# Altium PCB Final decision V4.PcbDoc (part 1 of 2)
Units mm, origin at the board's own origin, x right, y up, seen from the top; angles counter-clockwise.
Board outline 75 x 61 mm, 4 copper layers (Top Layer, Signal, GND, Bottom Layer), stack 0.603 mm thick; 144 components, 114 nets, 552 pads, 168 vias.
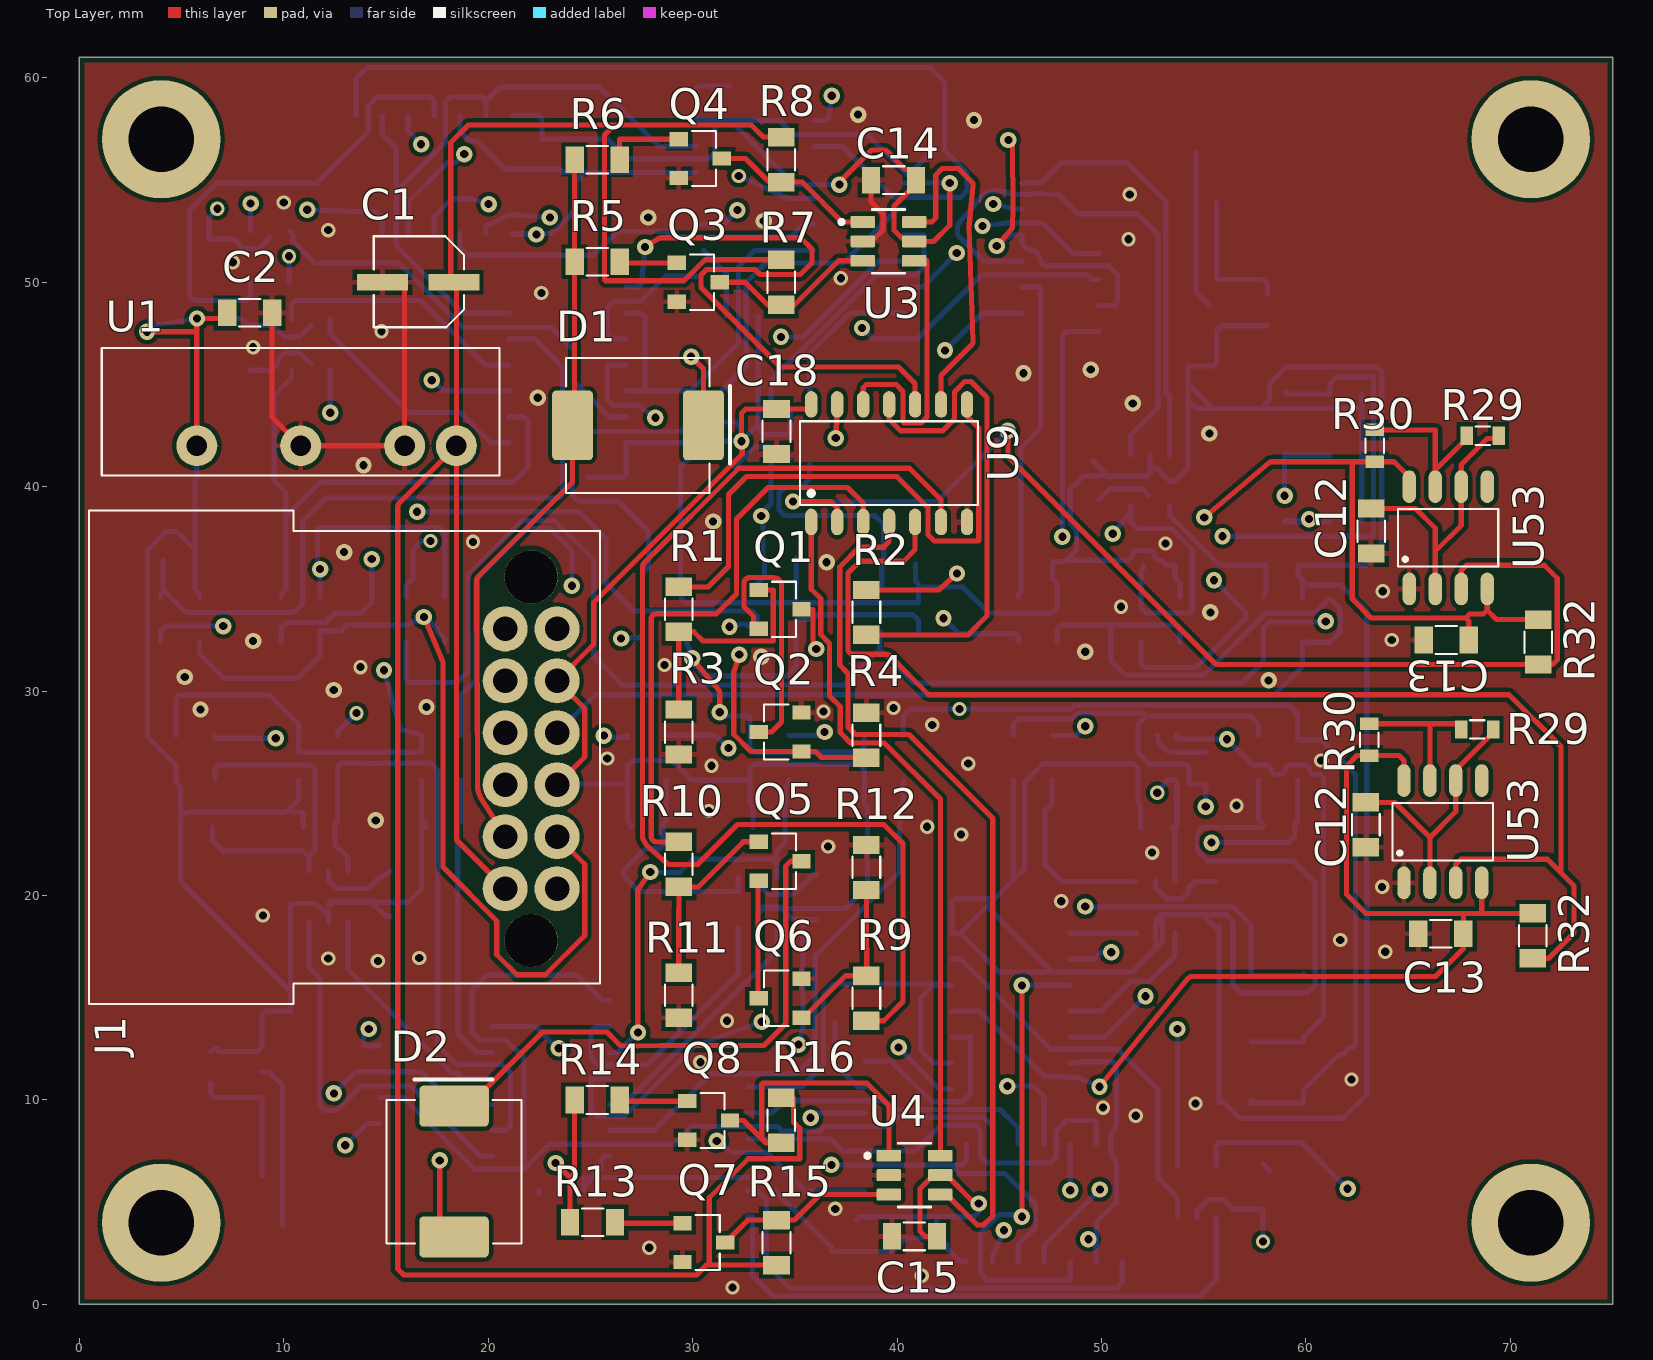
[diagram p0: Top Layer view]
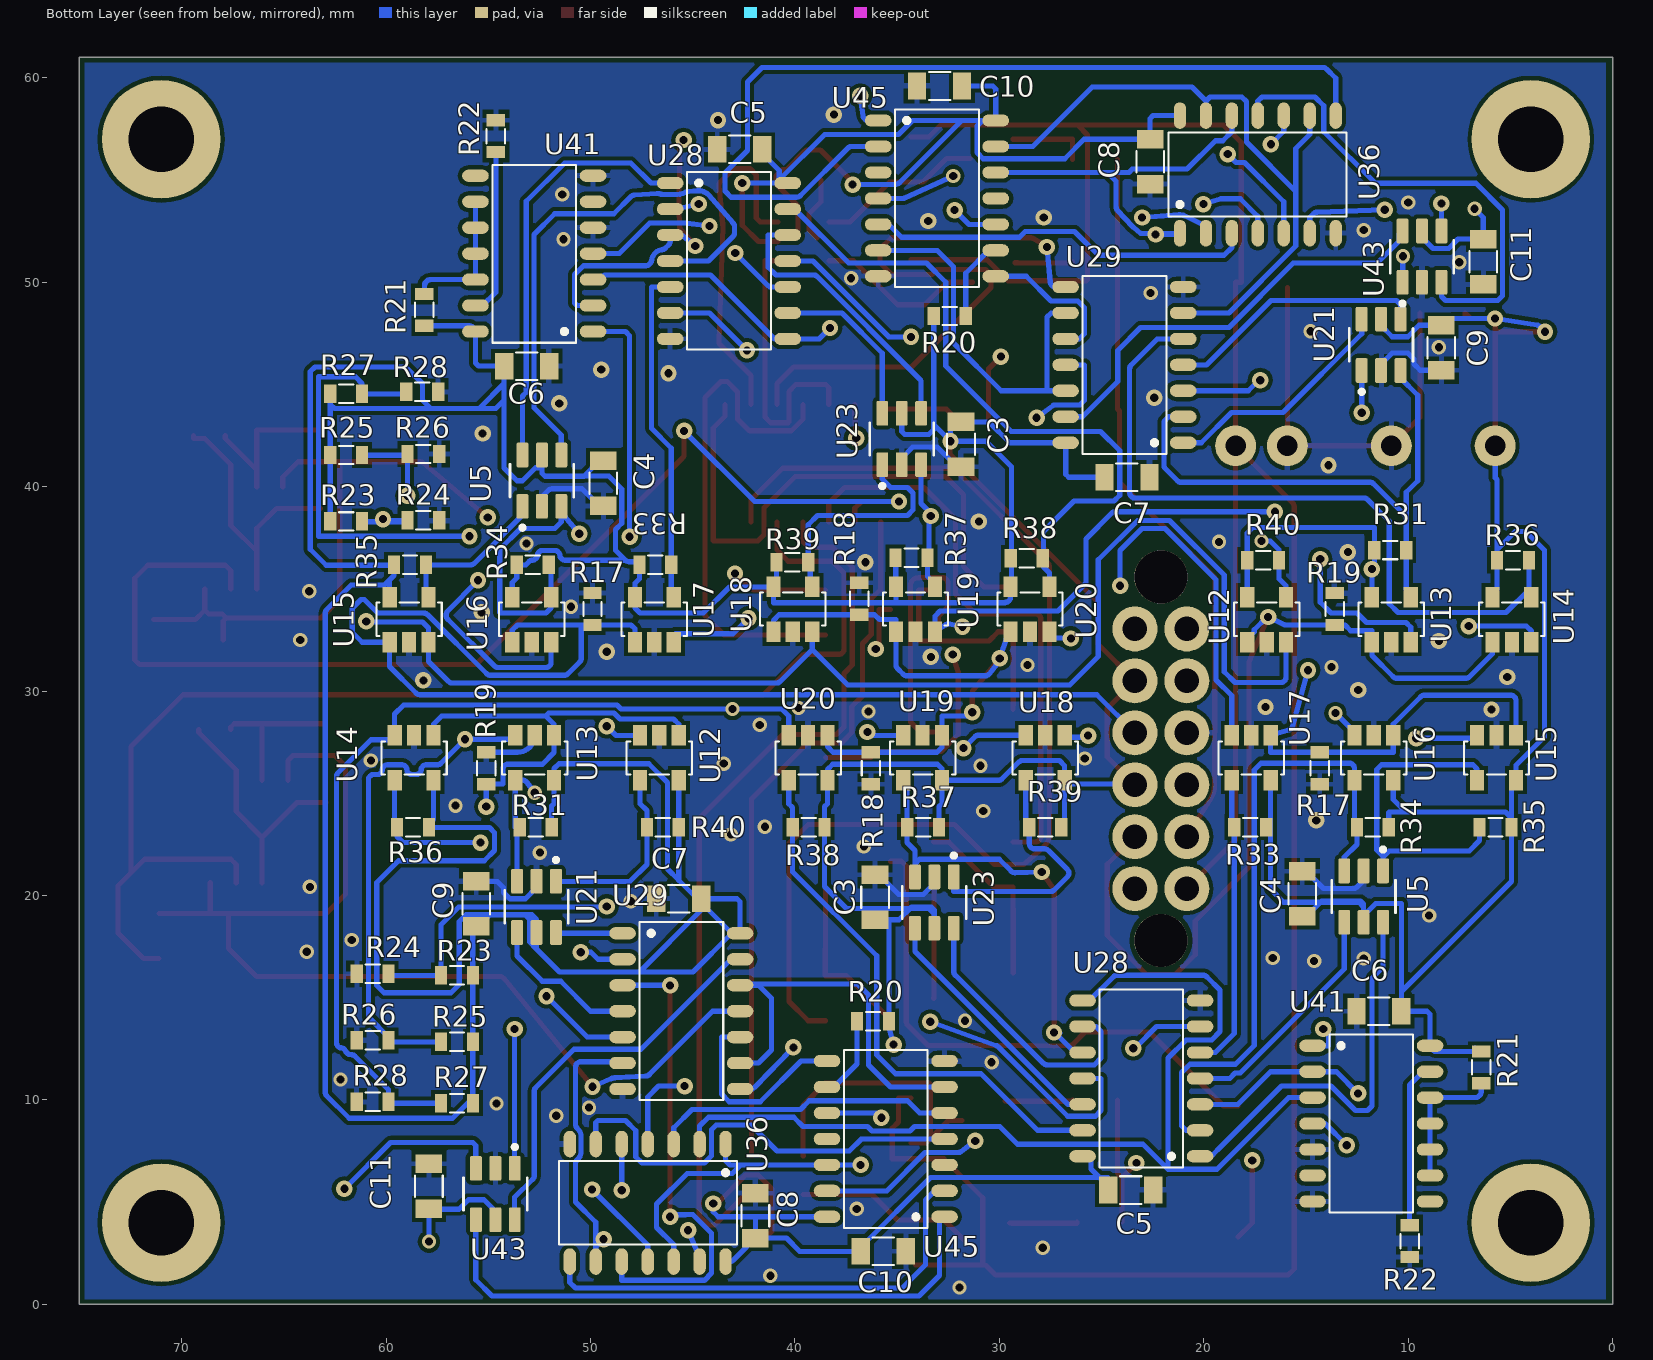
[diagram p1: Bottom Layer view, seen from below]
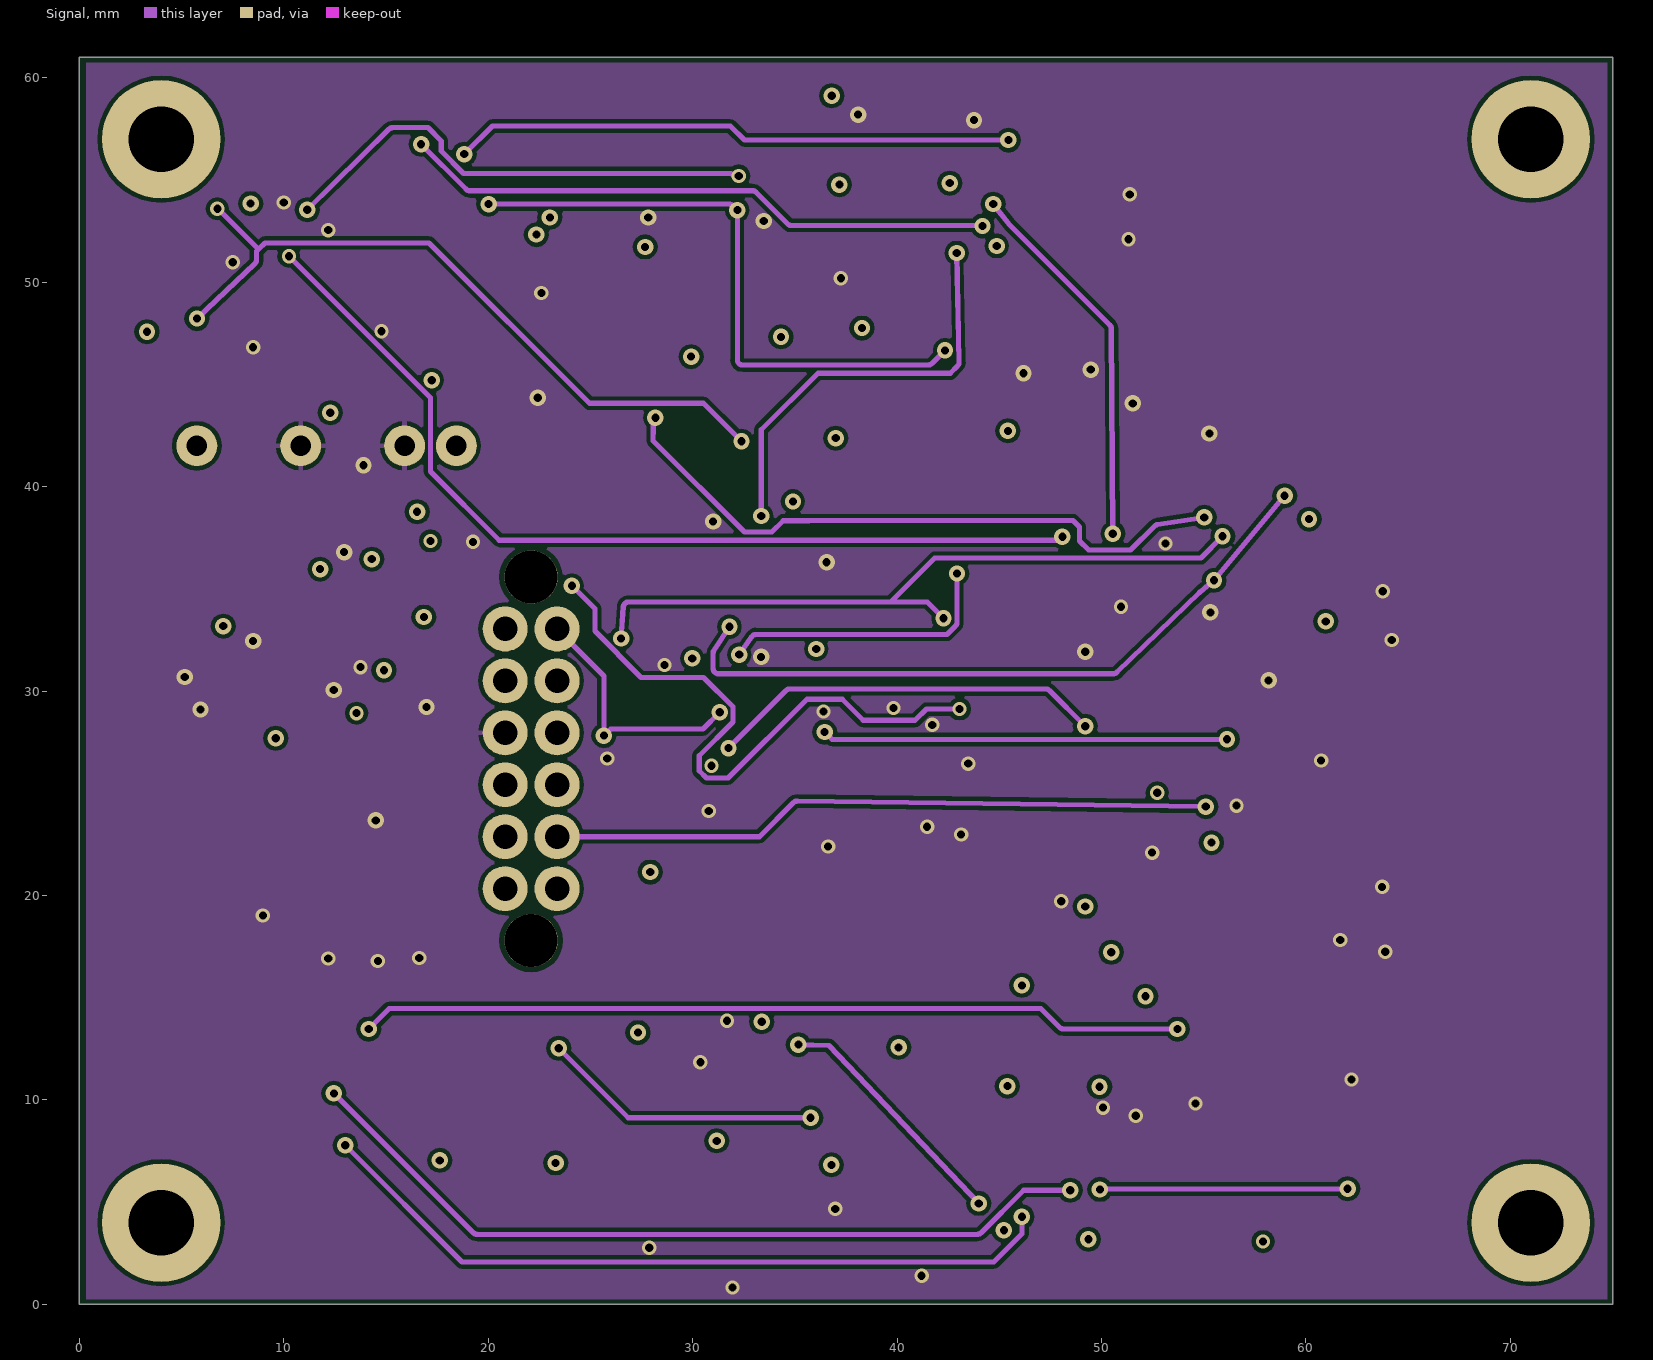
[diagram p2: Signal]
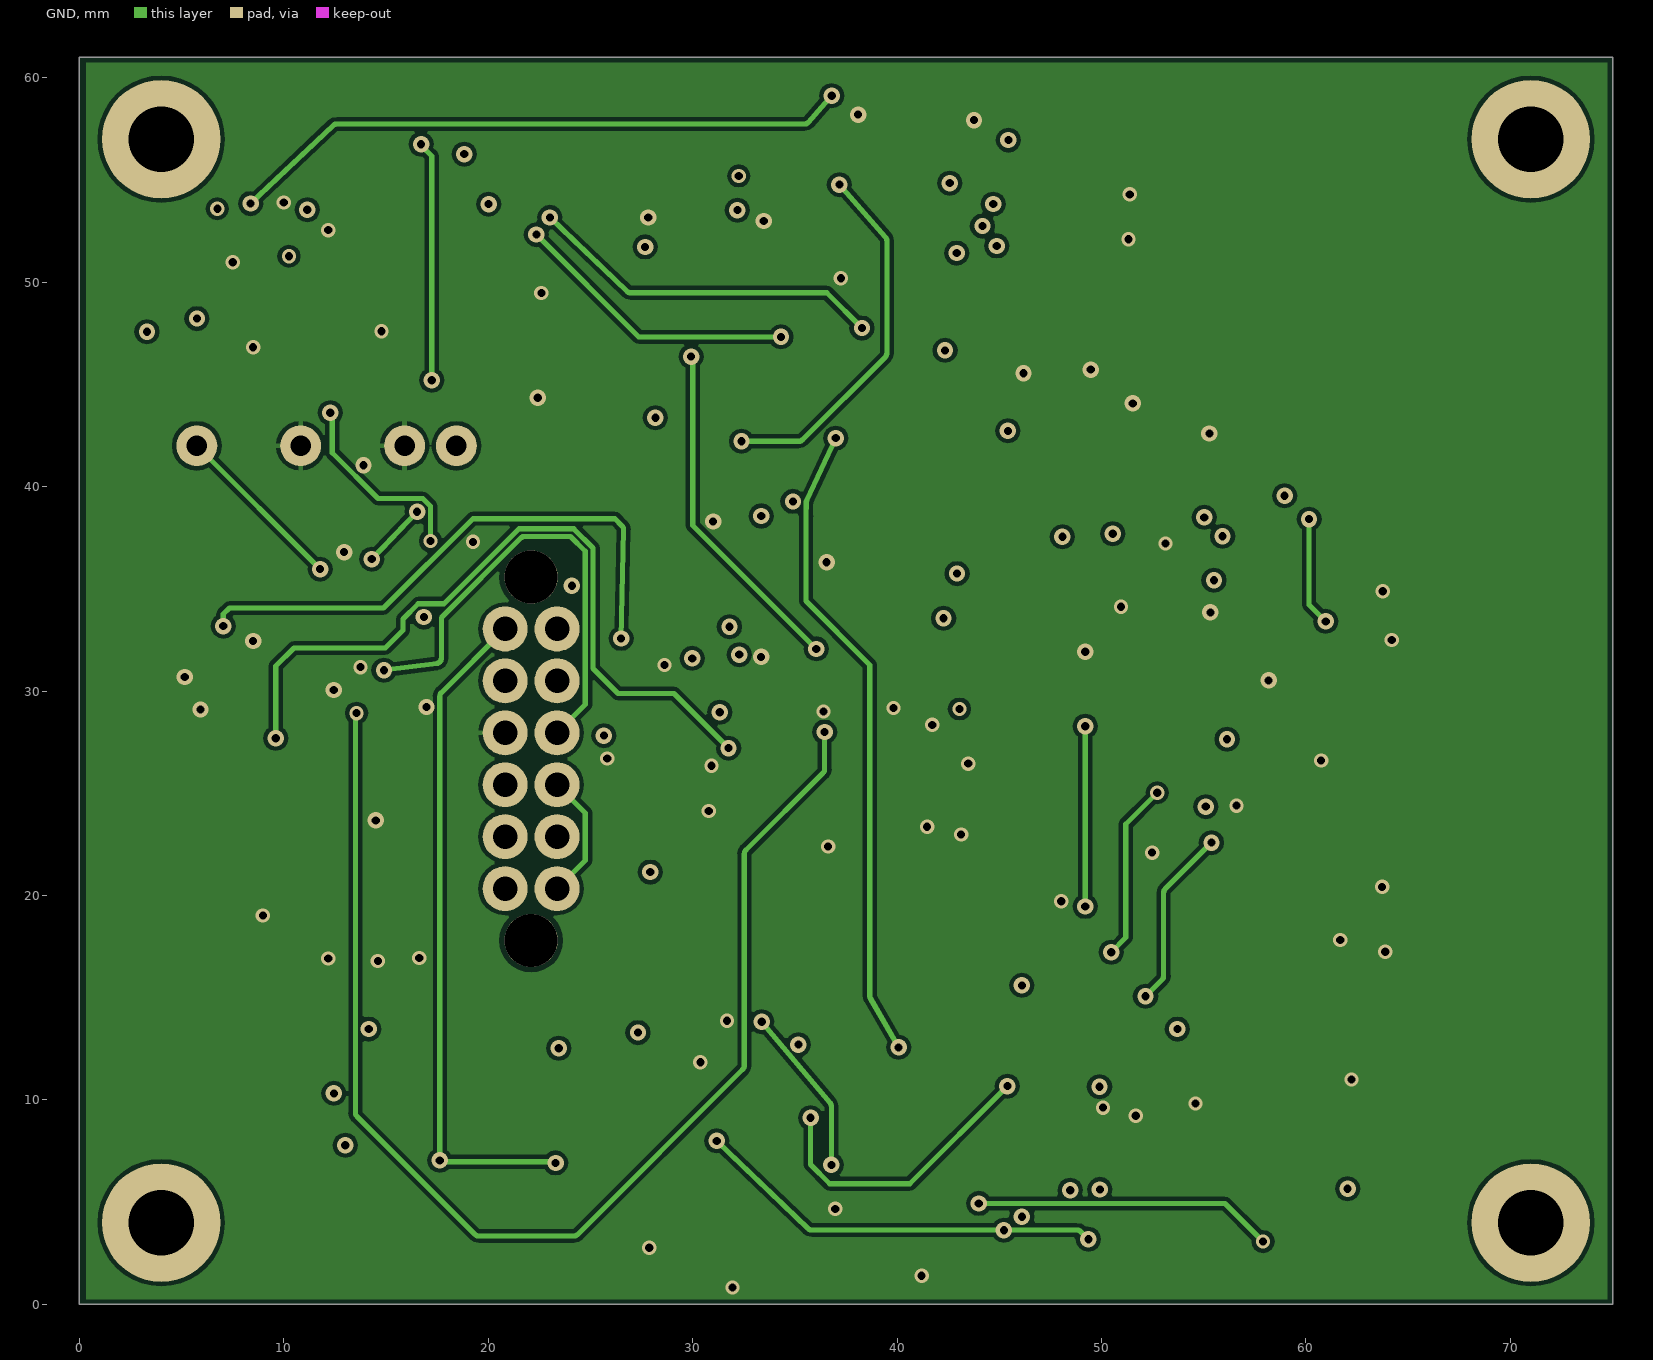
[diagram p3: GND]

## Layer stack, top to bottom
Top Solder: solder mask 0.0102, Solder Resist, Dk 3.5
Top Layer: signal copper 0.0356
Dielectric 2: prepreg 0.0711, PP-006, Dk 4.1
Signal: signal copper 0.035
Dielectric 1: dielectric 0.32, FR-4, Dk 4.8
GND: signal copper 0.035
Dielectric 3: prepreg 0.0711, PP-006, Dk 4.1
Bottom Layer: signal copper 0.0356
Bottom Solder: solder mask 0.0102, Solder Resist, Dk 3.5

## Board outline
0,0 0,61 75,61 75,0

## Design rules (kind name [scope] priority, off if disabled: settings)
AcuteAngle [All] p1: minimum=3.50000000000000E+0001 checktracksonly=FALSE
BoardOutlineClearance "BoardOutlineClearance 1" [All] p1: gap=0.25 ignorepadtopadclearanceinfootprint=FALSE except(0: Arc-SplitContinuation Track-SplitContinuation SMDPad-SplitContinuation THPad-SplitContinuation Via-SplitContinuation Fill-SplitContinuation Poly-SplitContinuation Region-SplitContinuation Text-SplitContinuation) // Milling
Clearance "Clearance-1 1/2 Oz" [All] p1: gap=0.125 ignorepadtopadclearanceinfootprint=FALSE except(0.2: Arc-Fill Arc-Poly Track-Fill Track-Poly SMDPad-SMDPad SMDPad-Fill SMDPad-Poly THPad-Fill THPad-Poly Via-Fill Via-Poly Fill-Fill Fill-Poly Poly-Poly Poly-Region Poly-Text; 0.25: Arc-Hole Track-Hole SMDPad-Hole THPad-Hole Via-Hole Fill-Hole Poly-Hole Region-Hole Text-Hole) // Standart
ComponentClearance [All] p1: gap=0.1 collisioncheckmode=3 verticalgap=0.1 showdistances=FALSE
DiffPairsRouting "DiffPairsRouting 1/2 Oz" [All] p1: maxlimit=0.254 minlimit=0.125 mostfreqgap=0.254 toplayer_minwidth=0.125 toplayer_maxwidth=0.381 toplayer_prefwidth=0.381 midlayer1_minwidth=0.125 midlayer1_maxwidth=0.381 midlayer1_prefwidth=0.381 midlayer2_minwidth=0.125 midlayer2_maxwidth=0.381 midlayer2_prefwidth=0.381 bottomlayer_minwidth=0.125 bottomlayer_maxwidth=0.381 bottomlayer_prefwidth=0.381 maxuncoupledlength=12.7
HoleSize "Minimum HoleSize" [IsPad] p1: absolutevalues=TRUE maxlimit=5.9 minlimit=0.6 maxpercent=80.000 minpercent=20.000
HoleSize "Minimum HoleSize VIA 1" [IsVia] p2: absolutevalues=TRUE maxlimit=5.9 minlimit=0.3 maxpercent=80.000 minpercent=20.000 // Standart
HoleToHoleClearance Hole2HoleClearance [All] p1: gap=0.25 allowstackedmicrovias=FALSE
MinimumAnnularRing "Minimum AR VIA Standart" [All] p1: minimumring=0.15
MinimumAnnularRing "Minimum AR PAD Standart" [All] p2: minimumring=0.2
MinimumSolderMaskSliver "SolderMask Bridge Standart" [All] p1: minsoldermaskwidth=0.15 // All Masks
PlaneClearance "PlaneClearance-1 1/2 Oz" [All] p1: clearance=0.2 // Standart
PlaneConnect "TermalConnect-1 1/2 Oz" [All] p1: planeconnectstyle=Relief reliefexpansion=0.2 reliefentries=4 reliefconductorwidth=0.2 reliefairgap=0.2 // Standart
PolygonConnect "PolygonConnect-1 1/2 Oz" [All] p1: thpad.connectstyle=Relief thpad.reliefconductorwidth=0.254 thpad.reliefentries=4 thpad.polygonreliefangle="90 Angle" thpad.airgapwidth=0.2 smdpad.connectstyle=Relief smdpad.reliefconductorwidth=0.254 smdpad.reliefentries=4 smdpad.polygonreliefangle="90 Angle" smdpad.airgapwidth=0.2 via.connectstyle=Direct via.reliefconductorwidth=0.254 via.reliefentries=4 via.polygonreliefangle="90 Angle" via.airgapwidth=0.254 // Standart
RoomDefinition A1 [InComponentClass('A1')] p1: confinementstyle=ConfineIn formatcopy=TRUE lockcomponents=FALSE outline 44.775,0.451 74.8,0.451 74.8,60.15 44.775,60.15
RoomDefinition A2 [InComponentClass('A2')] p2: confinementstyle=ConfineIn formatcopy=TRUE lockcomponents=FALSE outline 39.765,0.297 69.215,0.297 69.215,61.573 39.765,61.573
RoomDefinition PL [InComponentClass('PL')] p3: confinementstyle=ConfineIn formatcopy=TRUE lockcomponents=FALSE outline 25.225,1.115 43.725,1.115 43.725,16.615 25.225,16.615
RoomDefinition SL [InComponentClass('SL')] p4: confinementstyle=ConfineIn formatcopy=TRUE lockcomponents=FALSE outline 24.375,41.875 42.875,41.875 42.875,57.375 24.375,57.375
RoomDefinition "Sheet1 V2" [InComponentClass('Sheet1 V2')] p5: confinementstyle=ConfineIn formatcopy=TRUE lockcomponents=FALSE outline 50.325,0 50.325,62 -10.675,62 -10.675,0
RoutingCorners [All] p1 off: cornerstyle=45-Degree minsetback=2.54 maxsetback=2.54
RoutingVias [All] p1: holewidth=0.4 width=0.8 viastyle="Through Hole" minholewidth=0.3 minwidth=0.6 maxholewidth=5.9 maxwidth=8.9
SilkToSilkClearance Silk2SilkClearance [All] p1 off: silktosilkclearance=0.15
SilkToSolderMaskClearance Silk2SolderMaskClearance [IsPad] p1 off: minsilkscreentomaskgap=0.15 clearancetoexposedcopper=TRUE
SolderMaskExpansion SolderMaskExpansion-1 [All] p1: expansion=0.05 istentingtop=FALSE // Standart
UnRoutedNet [All] p1: checkbadconnections=TRUE
Width "Width 1/2 Oz" [All] p1: maxlimit=10 minlimit=0.125 preferedwidth=0.254 checkconnectedcopper=TRUE
19 further rules are at their usual default settings.

## Classes and differential pairs
channel class SignalReciever: A1 A2
channel class Logic: PL SL
component class "Sheet1 V2": C1 C2 C14 C15 C18 D1 D2 J1 Q1 Q2 Q3 Q4 Q5 Q6 Q7 Q8 R1 R2 R3 R4 R5 R6 R7 R8 R9 R10 R11 R12 R13 R14 R15 R16 U1 U3 U4 U9
component class SL: C12 C13 R29 R30 R32 U53
component class A2: C3 C4 C5 C6 C7 C8 C9 C10 C11 R17 R18 R19 R20 R21 R22 R23 R24 R25 R26 R27 R28 R31 R33 R34 R35 R36 R37 R38 R39 R40 U5 U12 U13 U14 U15 U16 U17 U18 U19 U20 U21 U23 U28 U29 U36 U41 U43 U45
component class A1: C3 C4 C5 C6 C7 C8 C9 C10 C11 R17 R18 R19 R20 R21 R22 R23 R24 R25 R26 R27 R28 R31 R33 R34 R35 R36 R37 R38 R39 R40 U5 U12 U13 U14 U15 U16 U17 U18 U19 U20 U21 U23 U28 U29 U36 U41 U43 U45
component class PL: C12 C13 R29 R30 R32 U53

## Components (designator, comment, footprint, x,y, rotation, side; value= is the part's Value field where it differs from the comment)
C1 "4.7uF" "Bar Cap 4x5.4" 14.825,50 r90 top
C2 "4.7uF" "0805 Capicator" 8.325,48.5 r180 top
C3 "0.1uF" "0805 Capicator" 36.08,19.918 r270 bottom locked
C3 "0.1uF" "0805 Capicator" 31.875,42.072 r90 bottom
C4 "0.1uF" "0805 Capicator" 15.18,20.085 r270 bottom locked
C4 "0.1uF" "0805 Capicator" 49.375,40.16 r90 bottom
C5 "0.1uF" "0805 Capicator" 23.58,5.595 r0 bottom locked
C5 "0.1uF" "0805 Capicator" 42.7,56.5 r180 bottom
C6 "0.1uF" "0805 Capicator" 11.43,14.345 r180 bottom locked
C6 "0.1uF" "0805 Capicator" 53.125,45.9 r0 bottom
C7 "0.1uF" "0805 Capicator" 45.68,19.845 r180 bottom locked
C7 "0.1uF" "0805 Capicator" 23.755,40.46 r0 bottom
C8 "0.1uF" "0805 Capicator" 41.93,4.345 r270 bottom locked
C8 "0.1uF" "0805 Capicator" 22.625,55.9 r90 bottom
C9 "0.1uF" "0805 Capicator" 55.588,19.592 r270 bottom locked
C9 "0.1uF" "0805 Capicator" 8.375,46.795 r90 bottom
C10 "0.1uF" "0805 Capicator" 35.68,2.595 r0 bottom locked
C10 "0.1uF" "0805 Capicator" 32.925,59.6 r180 bottom
C11 "0.1uF" "0805 Capicator" 57.9,5.775 r90 bottom
C11 "0.1uF" "0805 Capicator" 6.325,51.01 r270 bottom
C12 "4.7uF" "0805 Capicator" 62.933,23.456 r270 top
C12 "4.7uF" "0805 Capicator" 63.198,37.831 r270 top
C13 "10nF" "0805 Capicator" 66.6,18.125 r0 top
C13 "10nF" "0805 Capicator" 66.865,32.5 r0 top
C14 "0.1uF" "0805 Capicator" 39.825,55 r180 top
C15 "0.1uF" "0805 Capicator" 40.85,3.325 r180 top
C18 "0.1uF" "0805 Capicator" 34.1,42.7 r90 top
D1 "Diode" DO-214AB(SMC) 27.325,43 r0 top
D2 "Diode" DO-214AB(SMC) 18.325,6.5 r90 top
J1 "Stack64 6x2" Conn6x2(Molex) 22.095,35.58 r270 top
Q1 "MOSFET-N [IRLML]" SOT-23 33.225,34.95 r270 top
Q2 "MOSFET-N [IRLML]" SOT-23 35.325,27.05 r90 top
Q3 "NPN" SOT-23 29.225,50.95 r270 top
Q4 "NPN" SOT-23 29.325,57 r270 top
Q5 "MOSFET-N [IRLML]" SOT-23 33.225,22.627 r270 top
Q6 "MOSFET-N [IRLML]" SOT-23 35.325,14.025 r90 top
Q7 "NPN" SOT-23 29.5,3.975 r270 top
Q8 "NPN" SOT-23 29.725,9.95 r270 top
R1 "10k" "0805 Resistor" 29.325,34 r90 top
R2 "10k" "0805 Resistor" 38.5,33.848 r270 top
R3 "10k" "0805 Resistor" 29.325,28 r90 top
R4 "10k" "0805 Resistor" 38.5,27.848 r270 top
R5 "10k" "0805 Resistor" 25.325,51 r180 top
R6 "10k" "0805 Resistor" 25.325,56 r180 top
R7 "1k" "0805 Resistor" 34.325,50 r90 top
R8 "1k" "0805 Resistor" 34.325,56 r90 top
R9 "10k" "0805 Resistor" 38.5,14.975 r270 top
R10 "10k" "0805 Resistor" 29.325,21.525 r90 top
R11 "10k" "0805 Resistor" 29.325,15.127 r90 top
R12 "10k" "0805 Resistor" 38.5,21.373 r270 top
R13 "10k" "0805 Resistor" 25.1,4.025 r180 top
R14 "10k" "0805 Resistor" 25.325,10 r180 top
R15 "1k" "0805 Resistor" 34.1,3.025 r270 top
R16 "1k" "0805 Resistor" 34.325,9 r90 top
R17 "1k" "0603 Resistor" 14.33,26.23 r90 bottom locked
R17 "1k" "0603 Resistor" 49.9,34.015 r270 bottom
R18 "1k" "0603 Resistor" 36.28,26.23 r90 bottom locked
R18 "1k" "0603 Resistor" 36.85,34.515 r270 bottom
R19 "1k" "0603 Resistor" 55.105,26.23 r270 bottom locked
R19 "1k" "0603 Resistor" 13.6,34.015 r270 bottom
R20 "1k" "0603 Resistor" 36.18,13.845 r180 bottom locked
R20 "1k" "0603 Resistor" 32.425,48.35 r0 bottom
R21 "10k" "0603 Resistor" 6.43,11.595 r270 bottom locked
R21 "10k" "0603 Resistor" 58.125,48.65 r90 bottom
R22 "10k" "0603 Resistor" 9.93,3.095 r270 bottom locked
R22 "10k" "0603 Resistor" 54.625,57.15 r90 bottom
R23 "1k" "0603 Resistor" 56.53,16.095 r0 bottom locked
R23 "1k" "0603 Resistor" 61.95,38.3 r180 bottom
R24 "3.9k" "0603 Resistor" 60.655,16.17 r180 bottom locked
R24 "3.9k" "0603 Resistor" 58.175,38.35 r0 bottom
R25 "2k" "0603 Resistor" 56.53,12.845 r180 bottom locked
R25 "2k" "0603 Resistor" 61.95,41.55 r0 bottom
R26 "3k" "0603 Resistor" 60.655,12.92 r180 bottom locked
R26 "3k" "0603 Resistor" 58.175,41.6 r0 bottom
R27 "3k" "0603 Resistor" 56.53,9.845 r180 bottom locked
R27 "3k" "0603 Resistor" 61.95,44.55 r0 bottom
R28 "2k" "0603 Resistor" 60.655,9.92 r180 bottom locked
R28 "2k" "0603 Resistor" 58.225,44.65 r0 bottom
R29 "51k" "0603 Resistor" 68.38,28.125 r0 top
R29 "51k" "0603 Resistor" 68.645,42.5 r0 top
R30 "4.7k" "0603 Resistor" 63.1,27.625 r90 top
R30 "4.7k" "0603 Resistor" 63.365,42 r90 top
R31 "3k" "0603 Resistor" 52.68,23.345 r180 bottom locked
R31 "3k" "0603 Resistor" 10.875,36.9 r0 bottom
R32 "24k" "0805 Resistor" 71.1,18.025 r270 top
R32 "24k" "0805 Resistor" 71.365,32.4 r270 top
R33 "3k" "0603 Resistor" 17.729,23.345 r180 bottom locked
R33 "3k" "0603 Resistor" 46.825,36.175 r0 bottom
R34 "3k" "0603 Resistor" 11.729,23.345 r180 bottom locked
R34 "3k" "0603 Resistor" 52.825,36.175 r0 bottom
R35 "3k" "0603 Resistor" 5.729,23.345 r180 bottom locked
R35 "3k" "0603 Resistor" 58.825,36.175 r0 bottom
R36 "3k" "0603 Resistor" 58.68,23.345 r180 bottom locked
R36 "3k" "0603 Resistor" 4.875,36.4 r0 bottom
R37 "3k" "0603 Resistor" 33.73,23.345 r180 bottom locked
R37 "3k" "0603 Resistor" 34.295,36.525 r0 bottom
R38 "3k" "0603 Resistor" 39.33,23.345 r180 bottom locked
R38 "3k" "0603 Resistor" 28.655,36.5 r0 bottom
R39 "3k" "0603 Resistor" 27.755,23.345 r180 bottom locked
R39 "3k" "0603 Resistor" 40.125,36.3 r0 bottom
R40 "3k" "0603 Resistor" 46.46,23.345 r180 bottom locked
R40 "3k" "0603 Resistor" 17.095,36.4 r0 bottom
U1 "DC/DC" SIP7 18.445,42 r270 top
U3 "Inv" SOT236 39.58,52 r0 top
U4 "Inv" SOT236 40.85,6.325 r0 top
U5 "Inv" SOT236 12.18,19.951 r270 bottom locked
U5 "Inv" SOT236 52.375,40.294 r90 bottom
U9 "2And" SOIC-14 35.8,38.275 r0 top
U12 "Comp" SOT-23-5 46.63,27.845 r0 bottom locked
U12 "Comp" SOT-23-5 16.925,32.4 r180 bottom
U13 "Comp" SOT-23-5 52.73,27.845 r0 bottom locked
U13 "Comp" SOT-23-5 10.825,32.4 r180 bottom
U14 "Comp" SOT-23-5 58.63,27.845 r0 bottom locked
U14 "Comp" SOT-23-5 4.925,32.4 r180 bottom
U15 "Comp" SOT-23-5 5.679,27.845 r0 bottom locked
U15 "Comp" SOT-23-5 58.875,32.4 r180 bottom
U16 "Comp" SOT-23-5 11.679,27.845 r0 bottom locked
U16 "Comp" SOT-23-5 52.875,32.4 r180 bottom
U17 "Comp" SOT-23-5 17.679,27.845 r0 bottom locked
U17 "Comp" SOT-23-5 46.875,32.4 r180 bottom
U18 "Comp" SOT-23-5 27.754,27.845 r0 bottom locked
U18 "Comp" SOT-23-5 40.1,32.9 r180 bottom
U19 "Comp" SOT-23-5 33.754,27.845 r0 bottom locked
U19 "Comp" SOT-23-5 34.1,32.9 r180 bottom
U20 "Comp" SOT-23-5 39.354,27.845 r0 bottom locked
U20 "Comp" SOT-23-5 28.5,32.9 r180 bottom
U21 "Inv" SOT236 52.638,19.447 r270 bottom locked
U21 "Inv" SOT236 11.325,46.94 r90 bottom
U23 "Inv" SOT236 33.18,19.655 r270 bottom locked
U23 "Inv" SOT236 34.775,42.334 r90 bottom
U28 "2And" SOIC-14 20.18,7.245 r90 bottom locked
U28 "2And" SOIC-14 46.1,54.85 r270 bottom
U29 "2And" SOIC-14 48.43,18.155 r270 bottom locked
U29 "2And" SOIC-14 21.005,42.15 r90 bottom
U36 "2XOR" SOIC-14 43.39,7.845 r0 bottom locked
U36 "2XOR" SOIC-14 21.165,52.4 r180 bottom
U41 "4NOR" SOIC-14 14.68,12.655 r270 bottom locked
U41 "4NOR" SOIC-14 49.875,47.59 r90 bottom
U43 "Inv" SOT236 54.65,5.4 r270 bottom
U43 "Inv" SOT236 9.325,51.255 r90 bottom
U45 "4AND" SOIC-14 32.68,4.285 r90 bottom locked
U45 "4AND" SOIC-14 35.925,57.91 r270 bottom
U53 "NE555P" SOIC-8 64.79,20.625 r90 top
U53 "NE555P" SOIC-8 65.055,35 r90 top

## Footprints (in the part's own frame and the unit in brackets; to place one, negate y for a bottom-side part, rotate by r counter-clockwise, add the part's x,y. Pads: shape width x height; smd on the part's side, far side on the other; paste and mask are expansions set on the pad)
"0603 Resistor" [mm]
  rect 0.6x0.9 smd: 1(-0.78,0) 2(0.78,0)
  silkscreen extent -0.35,-0.45 0.35,0.45, body extent -0.85,-0.45 0.85,0.45, height 0.55
"0805 Capicator" [mm]
  rect 0.9x1.3 smd: 1(-1.1,0) 2(1.1,0)
  silkscreen extent -0.53,-0.68 0.52,0.67, body extent -1.05,-0.67 1.05,0.68, height 0.75
"0805 Resistor" [mm]
  rect 0.9x1.3 smd: 1(-1.1,0) 2(1.1,0)
  silkscreen extent -0.52,-0.68 0.53,0.67, body extent -1.05,-0.67 1.05,0.68, height 0.6
"Bar Cap 4x5.4" [mm]
  rect 0.8x2.5 smd: 1(0,0) 2(0,-3.5)
  silkscreen extent -2.2,-4 2.25,0.42, body extent -2.15,-4.3 2.15,0.7, height 5.4
Conn6x2(Molex) [mm]
  round 2.2 hole 1.2: 1(2.54,1.27) 2(5.08,1.27) 3(7.62,1.27) 4(10.16,1.27) 5(12.7,1.27) 6(15.24,1.27) 7(2.54,-1.27) 8(5.08,-1.27) 9(7.62,-1.27) 10(10.16,-1.27) 11(12.7,-1.27) 12(15.24,-1.27)
  round 2.6 hole 2.6 unplated: A(0,0) A(17.78,0)
  silkscreen extent -3.25,-21.63 20.88,3.37, body extent -3.15,-31.93 20.79,3.23, height 22.06
DO-214AB(SMC) [mm]
  rrect20% 2x3.4 smd: 1(-3.2,0) 2(3.2,0)
  silkscreen extent -3.53,-3.3 4.5,3.3, body extent -4.06,-3.15 4.06,3.15, height 2.77
SIP7 [mm]
  round 2 hole 1: 1(0,0) 2(0,-2.54) 4(0,-7.62) 6(0,-12.7)
  silkscreen extent -4.78,-17.35 1.45,2.1, body extent -4.7,-17.27 1.39,2.03, height 10.16
SOIC-8 [mm]
  oval 1.6x0.65 smd: 1(0,0) 2(0,-1.27) 3(0,-2.54) 4(0,-3.81) 5(5,-3.81) 6(5,-2.54) 7(5,-1.27) 8(5,0)
  silkscreen extent 1.1,-4.35 3.9,0.55, body extent -0.36,-4.35 5.41,0.55, height 1.45
SOIC-14 [mm]
  oval 0.6x1.3 smd paste+0 mask+0.1: 1(0,0) 2(1.27,0) 3(2.54,0) 4(3.81,0) 5(5.08,0) 6(6.35,0) 7(7.62,0) 8(7.62,5.75) 9(6.35,5.75) 10(5.08,5.75) 11(3.81,5.75) 12(2.54,5.75) 13(1.27,5.75) 14(0,5.75)
  silkscreen extent -0.55,0.83 8.15,4.92, body extent -0.52,-0.12 8.13,5.87, height 1.75
SOT236 [mm]
  rrect25% 1.21x0.58 smd: 1(-1.255,0.95) 2(-1.255,0) 3(-1.255,-0.95) 4(1.255,-0.95) 5(1.255,0) 6(1.255,0.95)
  silkscreen extent -2.4,-1.56 0.8,1.56, body extent -1.4,-1.45 1.4,1.45, height 1.45
SOT-23 [mm]
  rect 0.7x0.9 smd: 1(0,0) 2(1.9,0) 3(0.95,2.1)
  silkscreen extent -0.4,0.65 2.3,1.83, body extent -0.55,-0.17 2.45,2.23, height 1.1
SOT-23-5 [mm]
  rect 0.7x1 smd mask+0.045: 1(-0.95,0) 2(0,0) 3(0.95,0) 4(0.95,2.2) 5(-0.95,2.2)
  silkscreen extent -1.6,0.3 1.6,1.92, body extent -1.5,-0.15 1.5,2.35, height 1.1

## Part data
C1: library part "Cap Pol 4.7uF", "ECAP SMD,  35V, 105°C", Manufacturer=Epcos, Part Number=B41121A7475M000, ComponentLink1Description=Chip&Dip, ComponentLink1URL=https://www.chipdip.ru/product/b41121a7475m000, Type=Capacitor
C2 C12 C12: library part "Cap 4.7uF (0805)", "4.7uF X5R 10% 25V 0805", Manufacturer="Murata Manufacturing", Part Number=GRM21BR61E475KA12L, ComponentLink1Description=Chip&Dip, ComponentLink1URL=https://www.chipdip.ru/product/grm21br61e475ka12l, Type=Capacitor
C3 C3 C4 C4 C5 C5 C6 C6 C7 C7 C8 C8 C9 C9 C10 C10 C11 C11 C14 C15 C18: library part "Cap 0.1uF (0805)", "0.1uF X7R 25V 10% 0805", Manufacturer="Murata Manufacturing", Part Number=GRM21BR71E104KA01L, ComponentLink1Description=Chip&Dip, ComponentLink1URL=https://www.chipdip.ru/product/grm21br71e104ka01l, Type=Capacitor
C13 C13: library part "Cap 10nF (0805)", "0805 X7R 10nF 100V 10%", Manufacturer="Murata Manufacturing", Part Number=GRM21BR72A103KA01L, ComponentLink1Description=Chip&Dip, ComponentLink1URL=https://www.chipdip.ru/product/grm21br72a103ka01l, Type=Capacitor
D1 D2: library part "Diode (SMC)", "3A 50V, (DO-214AB/SMC)", Manufacturer="Yangzhou Yangjie Electronic Technology", Part Number=GS3A, ComponentLink1Description=DataSheet, ComponentLink1URL=https://static.chipdip.ru/lib/152/DOC001152906.pdf, ComponentLink2Description=Chip&Dip, ComponentLink2URL=https://www.chipdip.ru/product/gs3a, Type=Diode
J1: library part "Conn 12 [Stack64]", "Stac64 Right-Angle Header Assembly, 12 Circuits, Polarization A, Black, Tray / Current - Maximum per Contact 10.0A / Voltage - Maximum 500V", ComponentLink1Description=Molex, ComponentLink1URL=https://www.molex.com/molex/products/part-detail/pcb_headers/0346910120, ComponentLink2Description=DataSheet, ComponentLink2URL=https://www.molex.com/webdocs/datasheets/pdf/en-us/0346910120_PCB_HEADERS.pdf
Q1 Q2 Q5 Q6: "VDS 30V,  VGS Max ± 20V, RDS 27-40mΩ,", Manufacturer="Infineon Technologies", Part Number=IRLML0030TRPBF, ComponentLink1Description=DataSheet, ComponentLink1URL=https://static.chipdip.ru/lib/300/DOC000300382.pdf, ComponentLink2Description=Chip&Dip, ComponentLink2URL=https://www.chipdip.ru/product/irlml0030trpbf, Type=Transistor
Q3 Q4 Q7 Q8: library part "NPN [BC817]", "NPN general-purpose transistors", Manufacturer=Nexperia, Part Number=BC817-40,215, ComponentLink1Description=DataSheet, ComponentLink1URL=https://static.chipdip.ru/lib/156/DOC000156781.pdf, ComponentLink2Description=Chip&Dip, ComponentLink2URL=https://www.chipdip.ru/product/bc817-40, Type=Transistor
R1 R2 R3 R4 R5 R6 R9 R10 R11 R12 R13 R14: library part "Res 10k (0805)", "0.125W 0805 10k, 1%", Manufacturer=Taiwan, Part Number=RC0805FR-0710KL, ComponentLink1Description=Chip&Dip, ComponentLink1URL=https://www.chipdip.ru/product0/9000079514, Type=Resistor
R7 R8 R15 R16: library part "Res 1k (0805)", "0.125W 0805 1k, 1%", Manufacturer=Taiwan, Part Number=RC0805FR-071KL, ComponentLink1Description=Chip&Dip, ComponentLink1URL=https://www.chipdip.ru/product0/9000079486, Type=Resistor
R17 R17 R18 R18 R19 R19 R20 R20 R23 R23: library part "Res 1k (0603)", "0.1W 0603 1k, 1%", Manufacturer=Taiwan, Part Number=RC0603FR-071KL, ComponentLink1Description=Chip&Dip, ComponentLink1URL=https://www.chipdip.ru/product0/9000079676, Type=Resistor
R21 R21 R22 R22: library part "Res 10k (0603)", "0.1W 0603 10k, 1%", Manufacturer=Taiwan, Part Number=RC0603FR-0710KL, ComponentLink1Description=Chip&Dip, ComponentLink1URL=https://www.chipdip.ru/product0/9000079736, Type=Resistor
R24 R24: library part "Res 3.9k (0603)", "0.1W 0603 3.9k, 1%", Manufacturer=Taiwan, Part Number=RC0603FR-073K9L, ComponentLink1Description=Chip&Dip, ComponentLink1URL=https://www.chipdip.ru/product0/9000079726, Type=Resistor
R25 R25 R28 R28: library part "Res 2k (0603)", "0.1W 0603 2k, 1%", Manufacturer=Taiwan, Part Number=RC0603FR-072KL, ComponentLink1Description=Chip&Dip, ComponentLink1URL=https://www.chipdip.ru/product0/9000079719, Type=Resistor
R26 R26 R27 R27 R31 R31 R33 R33 R34 R34 R35 R35 R36 R36 R37 R37 R38 R38 R39 R39 R40 R40: library part "Res 3k (0603)", "0.1W 0603 3k, 1%", Manufacturer=Taiwan, Part Number=RC0603FR-073KL, ComponentLink1Description=Chip&Dip, ComponentLink1URL=https://www.chipdip.ru/product0/9000079723, Type=Resistor
R29 R29: library part "Res 51k (0603)", "0.1W 0603 51k, 1%", Manufacturer=Taiwan, Part Number=RC0603FR-0751KL, ComponentLink1Description=Chip&Dip, ComponentLink1URL=https://www.chipdip.ru/product0/9000079753, Type=Resistor
R30 R30: library part "Res 4.7k (0603)", "0.1W 0603 4.7k, 1%", Manufacturer=Taiwan, Part Number=RC0603FR-074K7L, ComponentLink1Description=Chip&Dip, ComponentLink1URL=https://www.chipdip.ru/product0/9000079728, Type=Resistor
R32 R32: library part "Res 24k (0805)", "0.125W 0805 24k, 1%", Manufacturer=Taiwan, Part Number=RC0805FR-0724KL, ComponentLink1Description=Chip&Dip, ComponentLink1URL=https://www.chipdip.ru/product0/9000079523, Type=Resistor
U1: library part "DC/DC Isolated 24V-5V [TMH]", "The TMH series are ultra miniature, isolated 2 Watt DC/DC-converters in a Single-in-Line  package  (SIP)", Manufacturer="Traco Power", Part Number=TMH2405S, ComponentLink1Description=Chip&Dip, ComponentLink1URL=https://www.chipdip.ru/product/tmh-2405s, ComponentLink2Description=DataSheet, ComponentLink2URL=https://static.chipdip.ru/lib/005/DOC001005854.pdf, Type=IC
U3 U4 U5 U5 U21 U21 U23 U23 U43 U43: library part "Inverter (SN74)", "Dual inverter, 1.65-5.5V", Manufacturer="Texas Instruments", Part Number=SN74LVC2G04DBVR, ComponentLink1Description=Chip&Dip, ComponentLink1URL=https://www.chipdip.ru/product/sn74lvc2g04dbvr-2, ComponentLink2Description=DataSheet, ComponentLink2URL=https://static.chipdip.ru/lib/021/DOC001021810.pdf, Type=IC
U9 U28 U28 U29 U29: library part 4(2And), "4 logic elements \"2AND\"", Manufacturer="Texas Instruments", Part Number=SN74AC08DR, ComponentLink1Description=DataSheet, ComponentLink1URL=https://static.chipdip.ru/lib/551/DOC001551527.pdf, ComponentLink2Description=Chip&Dip, ComponentLink2URL=https://www.chipdip.ru/product/sn74ac08dr, Type=IC
U12 U12 U13 U13 U14 U14 U15 U15 U16 U16 U17 U17 U18 U18 U19 U19 U20 U20: library part "Comparator [LMV]", "Differential comparator with strobes", Manufacturer="Texas Instruments", Part Number=LMV331M5/NOPB, ComponentLink1Description=DataSheet, ComponentLink1URL=https://static.chipdip.ru/lib/291/DOC000291302.pdf, ComponentLink2Description=Chip&Dip, ComponentLink2URL=https://www.chipdip.ru/product/lmv331m5-nopb, Type=IC
U36 U36: library part 4(2XOR), "4 logic elements \"2XOR\"", Manufacturer=Nexperia, Part Number=74HC86D,653, ComponentLink1Description=Chip&Dip, ComponentLink1URL=https://www.chipdip.ru/product/74hc86d, ComponentLink2Description=DataSheet, ComponentLink2URL=https://ru.mouser.com/datasheet/2/916/74HC_HCT86-1319799.pdf, Type=IC
U41 U41: library part 2(4NOR), "2 logic elements \"4NOR\"", Manufacturer=Nexperia, Part Number=74HC4002D,652, ComponentLink1Description=Chip&Dip, ComponentLink1URL=https://www.chipdip.ru/product/74hc4002d, ComponentLink2Description=DataSheet, ComponentLink2URL=https://static.chipdip.ru/lib/493/DOC011493188.pdf, Type=IC
U45 U45: library part 2(4AND), "2 logic elements \"4AND\"", Manufacturer=Nexperia, Part Number=74HC21D,653, ComponentLink1Description=Chip&Dip, ComponentLink1URL=https://www.chipdip.ru/product/74hc21d.653, ComponentLink2Description=DataSheet, ComponentLink2URL=https://static.chipdip.ru/lib/522/DOC011522559.pdf, Type=IC
U53 U53: "Standard Timer Single 8-Pin PDIP Tube", Case/Package=PDIP, Current Rating=10mA, Frequency=500kHz, High Level Output Current=-200mA, Low Level Output Current=200mA, Manufacturer="Texas Instruments", Max Operating Temperature=70°C, Max Supply Voltage=16V, Min Operating Temperature=0°C, Min Supply Voltage=4.5V, Nominal Supply Current=2mA, Operating Supply Voltage=5V, Package Quantity=50, Quiescent Current=15mA, Category="Clock and Timing", ComponentLink1Description=https://datasheet.ciiva.com/1139/sa555-1139904.pdf?src-supplier=Element14, ComponentLink1URL=https://datasheet.ciiva.com/1139/sa555-1139904.pdf?src-supplier=Element14, ComponentLink2Description=https://datasheet.ciiva.com/19457/904085-19457361.pdf?src-supplier=Jameco, ComponentLink2URL=https://datasheet.ciiva.com/19457/904085-19457361.pdf?src-supplier=Jameco, ComponentLink3Description=https://datasheet.ciiva.com/26325/152184-da-01-en-ne555p-timer-tid-26325915.pdf?src-supplier=Conrad, ComponentLink3URL=https://datasheet.ciiva.com/26325/152184-da-01-en-ne555p-timer-tid-26325915.pdf?src-supplier=Conrad, ComponentLink4Description=https://datasheet.ciiva.com/1147/1764032-1147750.pdf?src-supplier=Newark, ComponentLink4URL=https://datasheet.ciiva.com/1147/1764032-1147750.pdf?src-supplier=Newark, ComponentLink5Description=https://datasheet.ciiva.com/14094/ne555-series-eng-tds-14094950.pdf?src-supplier=Distrelec, ComponentLink5URL=https://datasheet.ciiva.com/14094/ne555-series-eng-tds-14094950.pdf?src-supplier=Distrelec, ComponentLink6Description=https://datasheet.ciiva.com/14274/ne555-14274456.pdf?src-supplier=Avnet, ComponentLink6URL=https://datasheet.ciiva.com/14274/ne555-14274456.pdf?src-supplier=Avnet, ComponentLink7Description=https://datasheet.ciiva.com/15152/getdatasheetpartid-248510-15152620.pdf?src-supplier=Verical, ComponentLink7URL=https://datasheet.ciiva.com/15152/getdatasheetpartid-248510-15152620.pdf?src-supplier=Verical, ComponentLink8Description=https://datasheet.ciiva.com/1233/ne555-1233454.pdf?src-supplier=Digi-Key, ComponentLink8URL=https://datasheet.ciiva.com/1233/ne555-1233454.pdf?src-supplier=Digi-Key, ComponentLink9Description=https://datasheet.ciiva.com/26228/ne555-26228892.pdf?src-supplier=Avnet+Europe, ComponentLink9URL=https://datasheet.ciiva.com/26228/ne555-26228892.pdf?src-supplier=Avnet+Europe, Contact Plating=Gold, Height=4.57mm, Lead Free="Lead Free", Length=9.81mm, Manufacturer Part Number=NE555P, Mount=SMD, Number of Pins=8, Number of Timers/Counters=1, Operating Supply Current=10mA, Packaging=Rail/Tube, Pricing 1="1=0,37000, 10=0,29900, 25=0,27360, 100=0,20350, 250=0,18444, 500=0,15264, 1000=0,11448, 2500=0,10494, 5000=0,10020 (USD)", Radiation Hardening=No, REACH SVHC="No SVHC", RoHS=Yes, RoHS Compliant=Yes, Supplier 1=Digi-Key, Weight=0.015535oz, Width=6.35mm

## Free pads (board coordinates)
  round 5.8 hole 3.2: A(4,57) A(4,4) A(71,57) A(71,4)

## Via types
v1: diameter 0.8, hole 0.4, Top Layer to Bottom Layer, 113 vias
v2: diameter 0.7, hole 0.4, Top Layer to Bottom Layer, 55 vias

## Nets (pads, with @x,y where several pads share a name; then routed paths per layer and width w, separated by ;. In a path a pad name is that pad's centre, name@x,y a point inside that pad or via, vN(x,y) a via of type N, cw(c..) or ccw(c..) an arc to the next point about the centre after c; other vN are vias at no path point)
2V_A1: R27.1@61.17,44.55 R28.2@59.005,44.65 U14.3@3.975,32.4 U17.3@45.925,32.4 U20.3@27.55,32.9 | length 92.4
  Signal w0.254: v1(26.5,32.575) 26.607,34.123 cw(c26.861,34.105) 26.861,34.359 29.376,34.359 39.685,34.359 ; v1(42.27,33.562) 41.474,34.359 39.685,34.359 ; v1(55.918,37.576) 54.862,36.519 41.846,36.519 39.685,34.359
  GND w0.254: v1(7.04,33.181) 7.04,33.766 7.339,34.065 14.883,34.065 19.254,38.435 26.196,38.435 26.547,38.084 cw(c26.367,37.905) 26.621,37.899 v1(26.5,32.575)
  Bottom Layer w0.254: U14.3@3.975,32.4 3.975,32.936 4.221,33.181 v1(7.04,33.181) ; v1(26.5,32.575) 27.307,32.612 ccw(c27.296,32.865) 27.55,32.865 U20.3@27.55,32.9 ; v1(42.27,33.562) 43.026,32.806 45.843,32.806 45.925,32.724 U17.3@45.925,32.4 ; v1(55.918,37.576) 63.301,37.576 63.301,45.373 61.498,45.373 61.17,45.046 R27.1@61.17,44.55 61.17,44.535 59.005,44.535 R28.2@59.005,44.65
2V_A2: R27.1@57.31,9.845 R28.2@59.875,9.92 U14.3@59.58,27.845 U17.3@18.629,27.845 U20.3@40.304,27.845 | length 91.2
  Signal w0.254: v1(24.092,35.15) 24.1,35.15 25.217,34.033 25.217,32.936 27.48,30.673 30.537,30.673 31.975,29.235 31.975,28.494 30.323,26.842 30.323,26.101 30.676,25.748 31.736,25.748 35.59,29.602 37.317,29.602 38.346,28.573 40.883,28.573 41.435,29.125 v2(43.05,29.125)
  Bottom Layer w0.254: U17.3@18.629,27.845 18.629,29.779 19.4,30.55 19.4,35.45 21.9,37.95 23.025,37.95 24.1,36.875 24.1,35.158 v1(24.092,35.15) ; U20.3@40.304,27.845 40.304,28.787 40.642,29.125 v2(43.05,29.125) 48.507,29.125 48.703,29.321 59.136,29.321 59.58,28.877 U14.3@59.58,27.845 59.58,27.619 60.736,27.619 62.351,26.004 ; R27.1@57.31,9.995 R27.1@57.31,9.845 57.31,9.839 59.875,9.839 R28.2@59.875,9.92 59.875,10.499 61.519,12.143 cw(c61.698,11.964) 61.698,12.218 61.735,12.218 ccw(c61.735,12.47) 61.971,12.383 cw(c62.209,12.294) 62.171,12.545 62.209,12.55 ccw(c62.171,12.802) 62.425,12.802 62.425,25.824 ccw(c62.171,25.824) 62.351,26.004
3V_A1: R25.1@61.17,41.55 R26.2@58.955,41.6 U13.3@9.875,32.4 U16.3@51.925,32.4 U19.3@33.15,32.9 | length 81.3
  Signal w0.254: v1(31.8,33.15) 31.042,31.999 ccw(c31.254,31.859) 31,31.859 31,31.103 ccw(c31.254,31.104) 31.253,30.85 50.57,30.85 ccw(c50.57,31.104) 50.746,30.921 54.805,34.835 cw(c54.982,34.653) 54.817,34.846 v1(55.5,35.425) v1(58.955,39.554)
  GND w0.254: v1(14.305,36.458) v1(16.523,38.775)
  Bottom Layer w0.254: U13.3@9.875,32.4 9.875,33.121 10.114,33.359 12.044,33.359 12.501,33.816 13.771,33.816 14.305,34.35 v1(14.305,36.458) ; v1(16.523,38.775) 24.328,38.775 cw(c24.328,38.521) 24.508,38.701 25.76,37.449 25.76,35.29 27.132,33.918 32.896,33.918 33.15,33.664 U19.3@33.15,32.9 32.708,33.188 32.618,33.247 ccw(c32.479,33.034) 32.426,33.282 v1(31.8,33.15) ; U16.3@51.925,32.4 51.925,31.408 ccw(c52.179,31.408) 52.179,31.154 54.513,31.154 ccw(c54.513,31.408) 54.692,31.228 56.981,33.517 ccw(c56.801,33.696) 57.052,33.663 57.057,33.696 ccw(c56.805,33.729) 56.986,33.907 v1(55.5,35.425) ; v1(58.955,39.554) R26.2@58.955,41.538 ; R26.2@58.955,41.6 R26.2@58.955,41.538 ; R25.1@61.17,41.55 61.17,41.538 R26.2@58.955,41.538
3V_A2: R25.1@57.31,12.845 R26.2@59.875,12.92 U13.3@53.68,27.845 U16.3@12.629,27.845 U19.3@34.704,27.845 | length 110.4
  Signal w0.254: v1(36.453,28) 36.826,27.627 56.121,27.627 v1(56.138,27.644)
  GND w0.254: v2(13.559,28.925) 13.5,28.866 13.5,9.377 ccw(c13.754,9.377) 13.574,9.198 19.348,3.424 ccw(c19.527,3.604) 19.526,3.35 24.195,3.35 ccw(c24.195,3.604) 24.375,3.424 32.454,11.503 ccw(c32.273,11.682) 32.527,11.682 32.527,22.039 cw(c32.781,22.038) 32.601,22.217 36.38,25.996 ccw(c36.199,26.175) 36.453,26.175 v1(36.453,28)
  Bottom Layer w0.254: U16.3@12.629,27.845 12.629,27.995 v2(13.559,28.925) v2@13.575,28.925 ; U19.3@34.704,27.845 34.704,27.822 36.276,27.822 v1(36.453,28) ; U13.3@53.68,27.845 53.68,27.644 v1(56.138,27.644) 57.311,26.471 ccw(c57.491,26.651) 57.491,26.397 58.03,26.397 cw(c58.03,26.145) 58.281,26.157 ccw(c58.535,26.171) 58.534,25.917 58.725,25.917 ccw(c58.724,26.171) 58.978,26.158 cw(c59.23,26.145) 59.23,26.397 59.93,26.397 cw(c59.93,26.145) 60.181,26.157 ccw(c60.435,26.171) 60.434,25.917 60.609,25.917 cw(c60.609,25.663) 60.863,25.663 60.863,14.053 59.875,13.065 R26.2@59.875,12.92 59.875,12.836 57.31,12.836 R25.1@57.31,12.845
4V_A1: R23.2@61.17,38.3 R24.2@58.955,38.35 U12.3@15.975,32.4 U15.3@57.925,32.4 U18.3@39.15,32.9 | length 72.3
  GND w0.254: v1(60.152,38.414) 60.152,34.223 v1(60.964,33.41)
  Bottom Layer w0.254: U12.3@15.975,32.4 15.975,30.679 ccw(c16.229,30.679) 16.229,30.425 18.475,30.425 19,30.95 19,35.675 21.675,38.35 23.233,38.35 25.159,36.424 25.159,31.7 26.559,30.3 37.412,30.3 39.15,32.038 ; U18.3@39.15,32.9 39.15,32.038 ; 40.714,30.474 39.15,32.038 ; 40.714,30.474 ccw(c40.894,30.654) 40.895,30.4 51.279,30.396 52.099,30.396 54.624,30.396 ; 54.625,30.396 54.895,30.396 ccw(c54.895,31.029) 54.896,30.396 56.767,30.4 ccw(c56.766,30.654) 56.945,30.474 57.925,31.454 U15.3@57.925,32.4 57.925,33.089 58.221,33.385 60.939,33.385 v1(60.964,33.41) ; v1(60.152,38.414) 60.088,38.35 R24.2@58.955,38.35 58.955,38.287 61.17,38.287 R23.2@61.17,38.3
4V_A2: R23.2@57.31,16.095 R24.2@59.875,16.17 U12.3@47.58,27.845 U15.3@6.629,27.845 U18.3@28.704,27.845 | length 86.7
  Signal w0.254: v1(31.754,27.212) 34.568,30.026 cw(c34.747,29.846) 34.747,30.1 47.278,30.1 cw(c47.278,29.846) 47.458,30.026 v1(49.204,28.279)
  GND w0.254: v1(9.606,27.695) 9.606,31.226 10.495,32.115 14.965,32.115 15.829,32.978 15.829,33.526 16.58,34.277 17.841,34.277 21.505,37.941 24.178,37.941 25.123,36.996 25.123,31.101 26.344,29.879 29.087,29.879 v1(31.754,27.212) ; v1(49.204,19.465) v1(49.204,28.279)
  Bottom Layer w0.254: U15.3@6.629,27.845 6.629,27.695 v1(9.606,27.695) ; U18.3@28.704,27.845 31.017,27.845 cw(c31.017,27.591) 31.196,27.77 v1(31.754,27.212) ; U12.3@47.58,27.845 47.58,27.822 48.747,27.822 v1(49.204,28.279) ; v1(49.204,19.465) 49.23,19.44 56.443,19.44 57.31,18.574 R23.2@57.31,16.095 57.31,16.087 59.875,16.087 R24.2@59.875,16.17
24V: C1.2 J1.12 R7.2 R8.2 R15.2 R16.2 U1.1 | length 143.9
  Top Layer w0.254: J1.12@20.825,20.34 18.445,22.72 U1.1@18.445,42 ; R15.2@34.1,1.925 30.815,1.925 ; R16.2@34.325,10.1 34.929,10.1 34.929,8.924 35.234,8.62 35.234,7.121 32.72,7.121 30.815,5.216 30.815,1.925 ; R7.2@34.325,51.1 30.598,51.1 29.57,50.072 25.735,50.072 25.684,50.123 25.684,57.21 26.166,57.692 ; R8.2@34.325,57.1 33.456,57.1 32.864,57.692 26.166,57.692 ; U1.1@18.445,42 15.649,39.204 ccw(c15.829,39.025) 15.575,39.025 15.575,1.729 15.873,1.431 30.18,1.431 30.673,1.925 30.815,1.925 ; U1.1@18.445,42 18.445,49.88 18.445,50 C1.2@18.325,50 18.165,50 18.165,56.829 19.029,57.692 26.166,57.692
GND: C1.1 C2.1 C3.1 C4.1 C5.1 C6.1 C7.1 C8.1 C9.1 C10.1 C11.2 C12.2 C13.1 C14.2 C15.2 C18.1 J1.9 Q2.2 Q3.2 Q4.2 Q6.2 Q7.2 Q8.2 R3.1 R4.1 R11.1 R12.1 R17.1 R18.1 R19.1 R22.2 R24.1 R26.1 R28.1 U1.2 U1.4 U3.2 U4.2 U5.2 U9.7 U12.2 U13.2 U14.2 U15.2 U16.2 U17.2 U18.2 U19.2 U20.2 U21.2 U23.2 U28.7 U29.7 U36.7 U41.5 U41.7 U43.2 U45.7 U53.1 | length 49.4
  Top Layer w0.254: C2.1@9.425,48.5 9.425,43.4 U1.4@10.825,42 U1.2@15.905,42 C1.1@15.905,49.727 ; C14.2@38.725,55 38.725,53.941 39.311,53.355 39.311,52.545 U3.2@38.929,52.163
  Bottom Layer w0.254: C9.1@8.375,45.695 9.406,45.695 9.715,46.004 9.715,46.233 10.023,46.542 10.783,46.542 U21.2@11.325,46 ; U5.2@12.18,21.206 U5.2@12.18,20.845 ; U5.2@12.253,20.666 12.496,20.423 ; U5.2@12.253,20.666 cw(c12.434,20.845) U5.2@12.18,20.845 ; 13.376,20.349 12.675,20.349 ; C4.1@14.698,20.903 14.144,20.349 12.675,20.349 ; C4.1@14.739,20.862 15.049,21.09 C4.1@15.18,21.185 ; C5.1@22.48,5.395 C5.1@22.48,5.595 ; C3.1@32.075,40.972 33.039,41.936 34.233,41.936 U23.2@34.775,41.394 ; U23.2@33.18,20.91 33.18,20.595 33.722,20.053 34.915,20.053 35.88,21.018 C3.1@36.08,21.018 ; C4.1@49.857,39.342 50.411,39.896 51.178,39.896 51.879,39.896 cw(c51.879,39.642) 52.058,39.822 U5.2@52.302,39.579 ; U21.2@52.638,20.702 52.638,20.387 53.18,19.845 53.939,19.845 54.248,20.153 54.248,20.383 54.557,20.692 C9.1@55.588,20.692 ; U13.2@52.73,27.845 52.818,27.472 52.818,27.471 ccw(c53.565,27.845) 53.565,27.01 ; 53.566,27.01 R19.1@55.105,27.01 ; C11.2@57.9,6.875 C11.2@58.223,6.552 ; U5.2@12.18,20.845 ccw(c12.434,20.845) 12.253,20.666 12.496,20.423 ; 12.496,20.423 ccw(c12.675,20.603) 12.675,20.349
  other v1: 14.5,23.675 5.925,29.1 16.98,29.225 12.446,30.055 58.175,30.525 5.158,30.689 33.35,31.675 49.2,31.925 8.5,32.45 55.325,33.85 36.55,36.3 12.95,36.8 31,38.3 13.9,41.05 55.275,42.6 51.525,44.075 22.425,44.35 46.181,45.553 49.475,45.725 33.475,53 27.825,53.171 43.761,57.933 38.093,58.201
  other v2: 31.95,0.825 41.2,1.4 27.875,2.775 36.975,4.675 51.675,9.225 50.075,9.625 54.6,9.825 62.225,11 30.375,11.85 31.675,13.875 14.6,16.8 12.175,16.925 16.626,16.949 63.875,17.25 61.675,17.825 8.975,19.025 48.025,19.725 63.725,20.425 52.475,22.1 36.625,22.4 43.132,22.984 41.47,23.366 30.786,24.135 56.6,24.4 30.925,26.35 43.484,26.452 60.741,26.611 25.825,26.7 41.719,28.35 36.4,29 39.825,29.175 13.75,31.175 28.625,31.275 64.2,32.5 50.95,34.125 63.757,34.889 53.125,37.225 19.25,37.3 8.5,46.825 14.776,47.601 22.6,49.475 37.25,50.2 7.5,50.975 51.317,52.106 12.175,52.55 10,53.9 51.384,54.299
GREEN_1: U9.10 U29.8@26.755,49.77 | length 31.7
  Top Layer w0.254: v1(27.675,51.725) 28.36,52.143 cw(c28.492,51.927) 28.492,52.181 35.285,52.181 35.844,51.622 35.844,50.957 35.264,50.377 33.299,50.377 33.045,50.631 30.679,50.631 30.408,50.361 30.408,49.751 34.303,45.856 40.067,45.856 40.88,45.043 U9.10@40.88,44.025
  Bottom Layer w0.254: U29.8@26.755,49.77 27.256,49.77 ccw(c27.256,50.024) 27.509,50 v1(27.675,51.725)
GREEN_2: U9.13 U29.8@42.68,10.535 | length 36.9
  Top Layer w0.254: v1(37,42.375) 37.07,43.675 U9.13@37.07,44.025
  GND w0.254: v1(37,42.375) 35.579,39.326 ccw(c35.809,39.219) 35.555,39.226 35.539,38.529 ccw(c35.793,38.523) 35.539,38.523 35.539,34.407 38.663,31.283 38.663,15.088 ccw(c38.917,15.088) 38.698,14.961 v1(40.075,12.575)
  Bottom Layer w0.254: v1(40.075,12.575) 41.982,10.611 ccw(c42.164,10.789) 42.164,10.535 U29.8@42.68,10.535
GREEN_LED_1: R1.2 U9.8 | length 27.9
  Top Layer w0.254: R1.2@29.325,35.1 30.756,35.1 31.754,36.098 31.754,39.614 32.637,40.497 39.98,40.497 41.508,38.969 41.508,37.652 41.813,37.347 43.972,37.347 43.997,37.372 43.997,42.866 43.42,43.443 U9.8@43.42,44.025
GREEN_LED_2: R2.2 U9.11 | length 24.8
  Top Layer w0.254: R2.2@38.5,32.748 43.462,32.748 44.404,33.689 44.404,44.357 43.616,45.145 43.311,45.145 42.803,44.637 42.803,43.316 42.219,42.732 40.174,42.732 39.61,43.296 U9.11@39.61,44.025
Green_On1_A1: U28.6@46.1,48.5 U36.4@17.355,52.4 U45.10@30.175,52.83 | length 40.9
  Signal w0.254: v1(20.02,53.823) 31.785,53.823 cw(c31.785,53.569) 31.964,53.749 v1(32.186,53.527) 32.186,46.204 ccw(c32.44,46.204) 32.44,45.95 41.52,45.95 ccw(c41.52,46.204) 41.699,46.024 v1(42.344,46.669)
  Bottom Layer w0.254: U36.4@17.355,52.4 17.355,53.224 18.216,54.086 19.121,54.086 cw(c19.121,53.832) 19.195,54.075 v1(20.02,53.823) ; U45.10@30.175,52.83 31.49,52.83 v1(32.186,53.527) ; v1(42.344,46.669) 44.175,48.5 U28.6@46.1,48.5
Green_On1_A2: U28.6@20.18,13.595 U36.4@47.2,7.845 U45.10@38.43,9.365 | length 38.8
  Signal w0.254: v1(23.449,12.531) 26.852,9.128 v1(35.768,9.128)
  GND w0.254: v1(35.768,9.128) 35.768,6.842 36.707,5.902 40.619,5.902 v1(45.394,10.677)
  Bottom Layer w0.254: U28.6@20.18,13.595 22.306,13.595 23.369,12.531 v1(23.449,12.531) ; v1(35.768,9.128) 36.005,9.365 U45.10@38.43,9.365 ; v1(45.394,10.677) 46.666,10.677 47.2,10.144 U36.4@47.2,7.845
Green_On2_A1: U28.11@40.35,51.04 U36.1@21.165,52.4 U36.12@18.625,58.15 U45.12@30.175,55.37 | length 41.6
  GND w0.254: v1(22.356,52.333) 27.36,47.329 v1(34.32,47.329)
  Bottom Layer w0.254: U36.12@18.625,58.15 18.625,57.368 19.071,56.922 19.424,56.922 20.812,55.533 23.499,55.533 23.662,55.37 24.719,55.37 ; U36.1@21.165,52.4 U36.1@21.165,52.384 ; v1(22.356,52.333) 21.165,52.333 U36.1@21.165,52.384 ; U45.12@30.175,55.37 24.719,55.37 ; v1(34.32,47.329) 35.404,47.329 39.115,51.04 U28.11@40.35,51.04 ; U36.1@21.165,52.384 23.093,52.384 23.436,52.672 ccw(c23.017,53.171) 23.495,52.728 24.219,53.51 ccw(c24.033,53.683) 24.287,53.683 24.287,54.939 24.719,55.37
Green_On2_A2: U28.11@25.93,11.055 U36.1@43.39,7.845 U36.12@45.93,2.095 U45.12@38.43,6.825 | length 36.4
  GND w0.254: v1(33.375,13.825) 36.724,9.859 cw(c36.53,9.695) 36.784,9.695 v1(36.784,6.825)
  Bottom Layer w0.254: U28.11@25.93,11.055 25.023,11.055 25.023,9.483 25.303,9.204 26.649,9.204 30.038,12.593 ; 30.039,12.594 cw(c30.217,12.412) 30.13,12.651 v1(33.375,13.825) ; v1(36.784,6.825) U45.12@38.43,6.825 39.334,6.825 42.651,6.825 ; U36.1@43.39,7.845 43.39,7.045 43.17,6.825 42.651,6.825 ; U36.12@45.93,2.095 45.93,2.923 46.766,3.76 46.766,4.911 45.267,6.41 43.066,6.41 42.651,6.825
Green_On3_A1: U29.6@21.005,48.5 U36.9@14.815,58.15 U36.13@19.895,58.15 U45.13@30.175,56.64 | length 33.6
  Bottom Layer w0.254: U36.9@14.815,58.15 14.815,57.233 15.498,56.549 15.498,54.441 ; U36.13@19.895,58.15 19.895,58.861 ; U29.6@21.005,48.5 18.773,48.5 15.498,51.774 15.498,54.441 ; U45.13@30.175,56.64 28.361,56.64 25.455,59.547 20.581,59.547 19.895,58.861 ; 15.498,54.441 17.911,56.854 17.911,58.835 18.14,59.064 19.692,59.064 19.895,58.861
Green_On3_A2: U29.6@48.43,11.805 U36.9@49.74,2.095 U36.13@44.66,2.095 U45.13@38.43,5.555 | length 43
  GND w0.254: v1(31.175,8) 35.643,3.712 ccw(c35.818,3.896) 35.817,3.642 v1(45.225,3.625) 48.796,3.641 cw(c48.797,3.387) 48.976,3.566 v1(49.357,3.186)
  Bottom Layer w0.254: v1(31.175,8) 31.864,7.478 ccw(c32.018,7.68) 32.018,7.426 33.634,7.426 35.505,5.555 U45.13@38.43,5.555 ; U36.13@44.66,2.095 44.66,2.259 cw(c44.914,2.259) 44.682,2.363 ccw(c44.45,2.467) 44.684,2.368 v1(45.225,3.625) ; U29.6@48.43,11.805 48.718,11.805 ccw(c48.718,12.059) 48.802,11.819 48.911,11.857 cw(c48.994,11.617) 48.993,11.871 50.474,11.871 cw(c50.474,11.617) 50.728,11.618 50.728,8.796 cw(c50.474,8.797) 50.644,8.608 ccw(c51.01,8.195) 50.458,8.195 50.458,7.495 ccw(c51.01,7.495) 50.644,7.082 cw(c50.474,6.892) 50.728,6.894 50.728,5.011 49.74,4.022 49.74,2.803 ; v1(49.357,3.186) 49.74,2.803 ; U36.9@49.74,2.095 49.74,2.803
LED_Strip_GREEN: D1.1 J1.11 R5.2 R6.2 | length 35.5
  Top Layer w0.254: J1.11@20.825,22.88 19.68,24.7 cw(c20.825,25.42) 19.473,25.42 19.435,35.421 cw(c19.689,35.422) 19.51,35.602 24.125,40.217 D1.1@24.125,43 24.125,43.697 24.225,43.797 R5.2@24.225,51 R6.2@24.225,56
LED_Strip_RED: D2.1 J1.7 R13.2 R14.2 | length 44.1
  Top Layer w0.254: v1(17.632,7.045) 17.632,3.986 18.318,3.3 D2.1@18.325,3.3 ; v1(23.296,6.918) 24,6.214 24,6.207 ; R13.2@24,4.025 24,6.207 ; R14.2@24.225,10 24.225,6.432 24,6.207
  GND w0.254: J1.7@20.825,33.04 17.706,29.921 ccw(c17.886,29.742) 17.632,29.742 v1(17.632,7.045) 17.696,6.981 23.233,6.981 v1(23.296,6.918)
NetC12_1: C12.1@62.933,24.556 R29.2@69.16,28.125 U53.2@66.06,20.625 U53.6@67.33,25.625 | length 12.6
  Top Layer w0.254: C12.1@62.933,24.556 64.348,24.556 66.06,22.844 ; U53.2@66.06,20.625 66.06,22.844 ; R29.2@69.16,28.125 69.16,27.975 67.33,26.145 U53.6@67.33,25.625 67.33,24.114 66.06,22.844
NetC12_1: C12.1@63.198,38.931 R29.2@69.425,42.5 U53.2@66.325,35 U53.6@67.595,40 | length 13.8
  Top Layer w0.254: C12.1@63.198,38.931 65.359,38.931 66.325,37.965 66.325,36.839 ; U53.2@66.325,35 66.325,36.839 ; R29.2@69.425,42.5 69.425,42.351 68.865,42.351 67.595,41.081 U53.6@67.595,40 67.595,38.109 66.325,36.839
NetD1_2: D1.2 Q1.3 | length 23
  Top Layer w0.254: v1(29.926,46.364) 30.525,45.765 D1.2@30.525,43 ; Q1.3@35.325,34 35.885,34 35.885,32.226 v1(36.047,32.064)
  GND w0.254: v1(29.926,46.364) 30.002,46.288 30.002,38.109 v1(36.047,32.064)
NetD2_2: D2.2 Q5.3 | length 27
  Top Layer w0.254: D2.2@18.325,9.7 19.029,9.7 22.648,13.319 25.802,13.319 26.387,12.734 ccw(c26.566,12.914) 26.489,12.672 ccw(c26.569,12.913) 26.564,12.659 27.316,12.648 ccw(c27.325,13.3) 27.332,12.648 28.405,12.658 33.387,12.658 ccw(c33.387,12.912) 33.566,12.732 34.475,13.641 ccw(c34.294,13.82) 34.548,13.82 34.548,14.237 34.548,21.447 34.779,21.677 Q5.3@35.325,21.677
NetQ1_1: Q1.1 R1.1 R3.2 | length 11.8
  Top Layer w0.254: R1.1@29.323,32.891 29.323,29.423 R3.2@29.325,29.1 ; R1.1@29.325,32.9 30.052,32.9 30.507,32.445 33.939,32.445 33.939,34.95 Q1.1@33.225,34.95
NetQ1_2: Q1.2 Q2.3 | length 12.9
  Top Layer w0.254: Q2.3@33.225,28 33.863,28 34.345,28.483 34.345,35.178 ccw(c33.984,35.178) 34.019,35.538 cw(c34.046,35.791) 34.008,35.54 33.944,35.549 ccw(c33.907,35.298) 33.908,35.552 32.775,35.552 ccw(c32.775,35.3) 32.564,35.437 32.557,35.428 ccw(c32.77,35.289) 32.516,35.29 32.516,34.124 32.976,33.664 32.976,33.05 Q1.2@33.225,33.05
NetQ2_1: Q2.1 R2.1 R4.2 | length 29.5
  Top Layer w0.254: v1(32.279,31.784) 32.02,30.964 ccw(c32.262,30.887) 32.008,30.887 32.008,27.888 32.847,27.05 Q2.1@35.325,27.05 36.004,27.05 36.306,26.748 R4.2@38.5,26.748 ; R2.1@38.5,34.948 41.95,34.948 ccw(c41.95,35.202) 42.121,35.014 v1(42.93,35.752)
  Signal w0.254: v1(32.279,31.784) 32.896,32.667 cw(c33.104,32.521) 33.104,32.775 42.448,32.775 42.856,33.183 ccw(c42.676,33.363) 42.93,33.363 v1(42.93,35.752)
NetQ3_1: Q3.1 R5.1 | length 2.9
  Top Layer w0.254: R5.1@26.425,51 26.425,50.936 29.099,50.936 29.113,50.95 Q3.1@29.225,50.95
NetQ3_3: Q3.3 R7.1 U3.3 | length 8.3
  Top Layer w0.254: Q3.3@31.325,50 32.559,50 33.659,48.9 R7.1@34.325,48.9 34.976,48.9 37.126,51.05 U3.3@38.325,51.05
NetQ4_1: Q4.1 R6.1 | length 3.9
  Top Layer w0.254: R6.1@26.425,56 26.425,57 Q4.1@29.325,57
NetQ4_3: Q4.3 R8.1 U3.1 | length 8.2
  Top Layer w0.254: Q4.3@31.425,56.05 32.584,56.05 32.821,55.813 33.66,54.974 ccw(c33.839,55.154) 33.838,54.9 R8.1@34.325,54.9 35.36,54.9 37.31,52.95 U3.1@38.325,52.95
NetQ5_1: Q5.1 R10.1 R11.2 | length 9
  Top Layer w0.254: R11.2@29.325,16.227 29.316,16.227 29.316,19.364 29.325,19.373 R10.1@29.325,20.425 30.276,20.425 32.478,22.627 Q5.1@33.225,22.627
NetQ5_2: Q5.2 Q6.3 | length 5.8
  Top Layer w0.254: Q6.3@33.225,14.975 33.202,14.975 33.202,20.727 Q5.2@33.225,20.727
NetQ6_1: Q6.1 R9.1 R12.2 | length 8.2
  Top Layer w0.254: Q6.1@35.325,14.025 35.425,14.025 36.558,15.159 36.558,15.165 37.469,16.075 R9.1@38.5,16.075 ; R12.2@38.5,20.273 38.5,17.519 ccw(c38.754,17.52) 38.502,17.491 38.513,17.394 cw(c38.261,17.365) 38.515,17.365 R9.1@38.515,16.09
NetQ7_1: Q7.1 R13.1 | length 3.4
  Top Layer w0.254: R13.1@26.2,4.025 26.2,3.971 29.389,3.971 29.392,3.975 Q7.1@29.5,3.975
NetQ7_3: Q7.3 R15.1 U4.3 | length 9
  Top Layer w0.254: Q7.3@31.6,3.025 31.602,3.025 32.702,4.125 R15.1@34.1,4.125 34.975,4.125 36.225,5.375 U4.3@39.595,5.375
NetQ8_1: Q8.1 R14.1 | length 3.4
  Top Layer w0.254: R14.1@26.425,10 26.425,9.94 29.611,9.94 29.621,9.95 Q8.1@29.725,9.95
NetQ8_3: Q8.3 R16.1 U4.1 | length 15.1
  Top Layer w0.254: Q8.3@31.825,9 32.492,9 33.592,7.9 33.626,7.934 ; R16.1@34.325,7.9 33.659,7.9 33.626,7.934 ; U4.1@39.595,7.275 39.603,7.275 39.603,9.737 38.511,10.829 33.431,10.829 33.38,10.779 33.38,8.179 33.626,7.934
NetR20_1: R20.1@36.96,13.845 U45.9@38.43,10.635 | length 4
  Bottom Layer w0.254: R20.1@36.96,13.845 36.96,11.755 38.08,10.635 U45.9@38.43,10.635
NetR20_1: R20.1@31.645,48.35 U45.9@30.175,51.56 | length 3.7
  Bottom Layer w0.254: U45.9@30.525,51.56 31.645,50.44 R20.1@31.645,48.35
NetR21_2: R21.2@6.43,10.815 U41.9@8.93,6.305 U41.10@8.93,7.575 U41.11@8.93,8.845 U41.12@8.93,10.115 | length 6.9
  Bottom Layer w0.254: R21.2@6.43,10.815 6.43,10.642 6.43,10.4 ccw(c6.684,10.4) 6.503,10.221 6.536,10.189 ccw(c6.715,10.369) 6.715,10.115 U41.12@8.93,10.115 U41.11@8.93,8.845 U41.10@8.93,7.575 U41.9@8.93,6.305
NetR21_2: R21.2@58.125,49.43 U41.9@55.625,53.94 U41.10@55.625,52.67 U41.11@55.625,51.4 U41.12@55.625,50.13 | length 7.1
  Bottom Layer w0.254: U41.9@55.625,53.94 U41.10@55.625,52.67 U41.11@55.625,51.4 U41.12@55.625,50.13 57.84,50.13 cw(c57.84,49.876) 58.019,50.056 58.019,50.047 58.125,49.845 ; 58.051,50.024 cw(c57.871,49.845) 58.125,49.845 ; R21.2@58.125,49.43 58.125,49.603 58.125,49.845
NetR22_1: R22.1@9.93,3.875 U41.13@8.93,11.385 | length 8.1
  Bottom Layer w0.254: U41.13@8.93,11.385 9.28,11.385 9.93,10.735 R22.1@9.93,3.875
NetR22_1: R22.1@54.625,56.37 U41.13@55.625,48.86 | length 7.8
  Bottom Layer w0.254: R22.1@54.625,56.37 54.625,49.51 U41.13@55.275,48.86
NetR29_1: R29.1@67.6,28.125 R30.2@63.1,28.405 U53.7@66.06,25.625 | length 7.5
  Top Layer w0.254: R30.2@63.1,28.405 66.06,28.405 ; U53.7@66.06,25.625 66.06,28.405 ; R29.1@67.6,28.125 67.6,28.232 67.427,28.405 66.06,28.405